# Altium PCB 12V_BuckConverter.PcbDoc
Units mil, origin at the board's own origin, x right, y up, seen from the top; angles counter-clockwise.
Board outline 1935 x 2655 mil, 2 copper layers (Top Layer, Bottom Layer); 26 components, 15 nets, 77 pads, 60 vias.
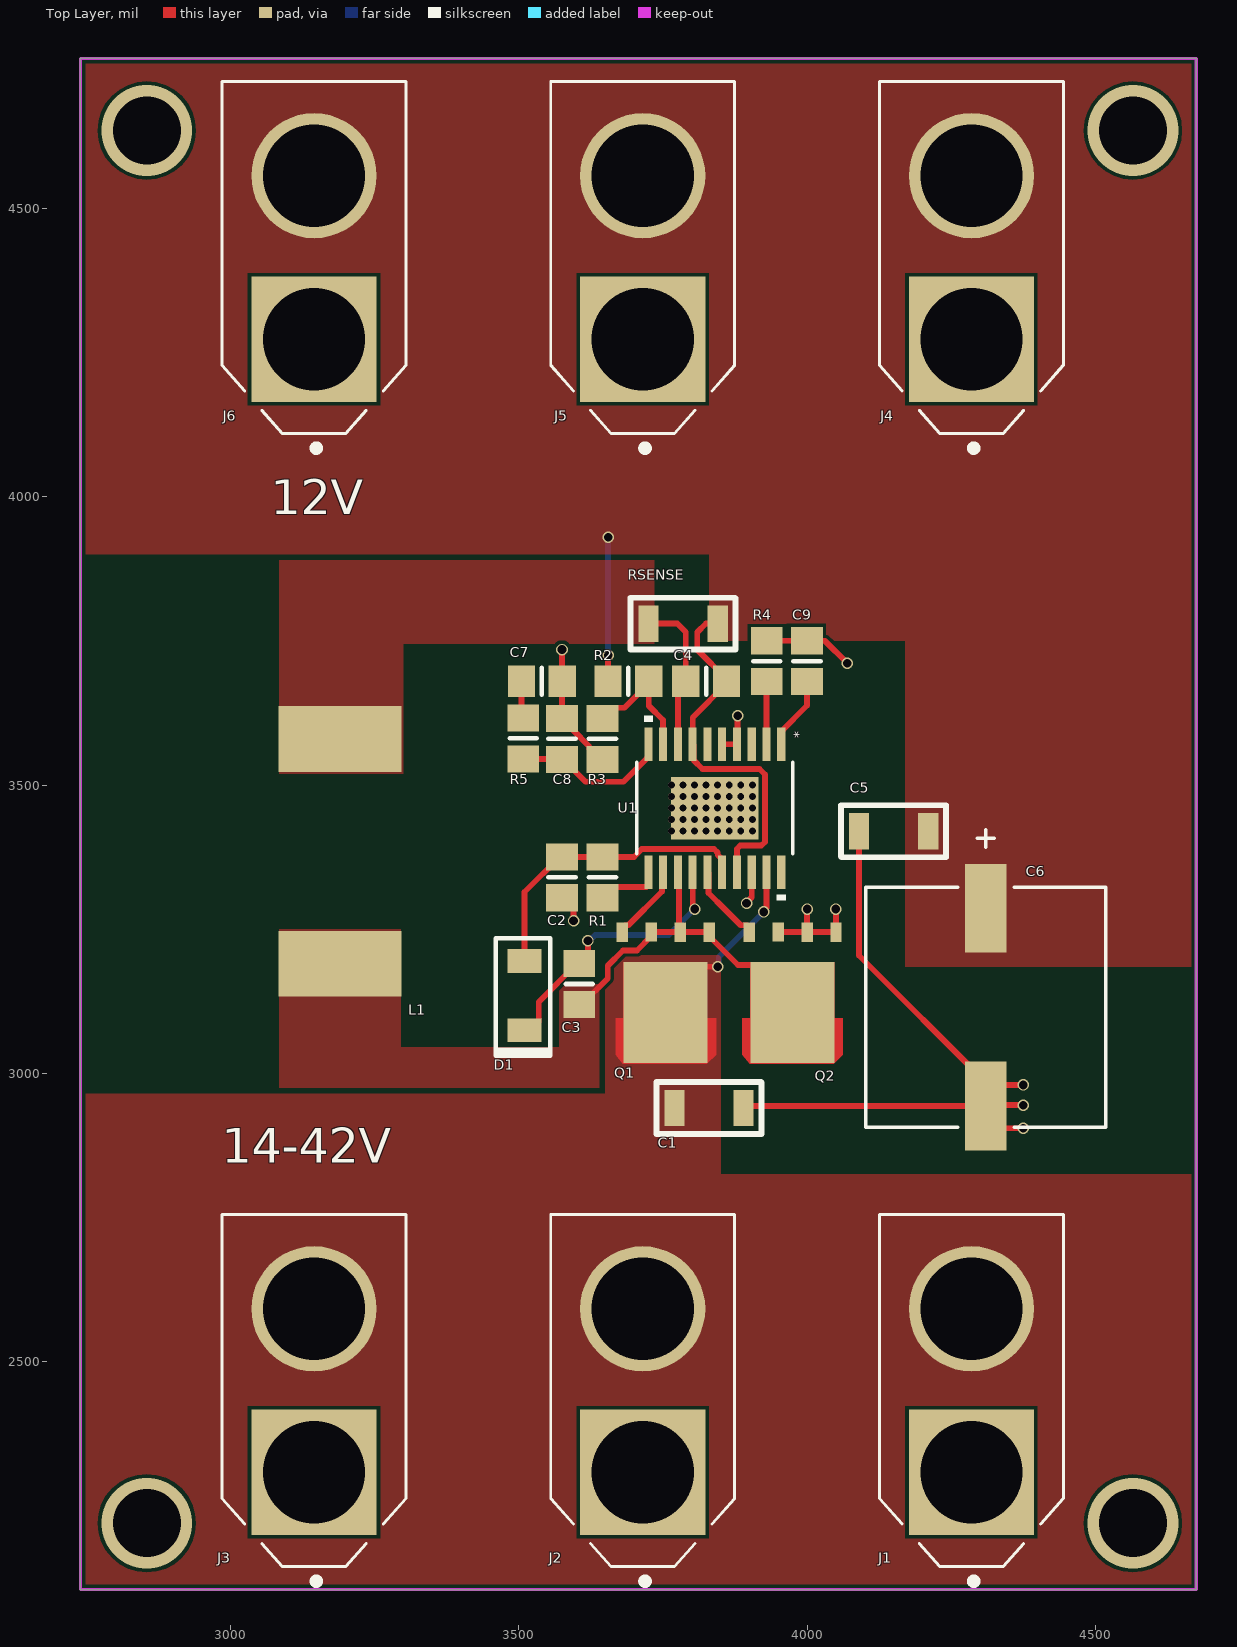
[diagram p0: Top Layer view]
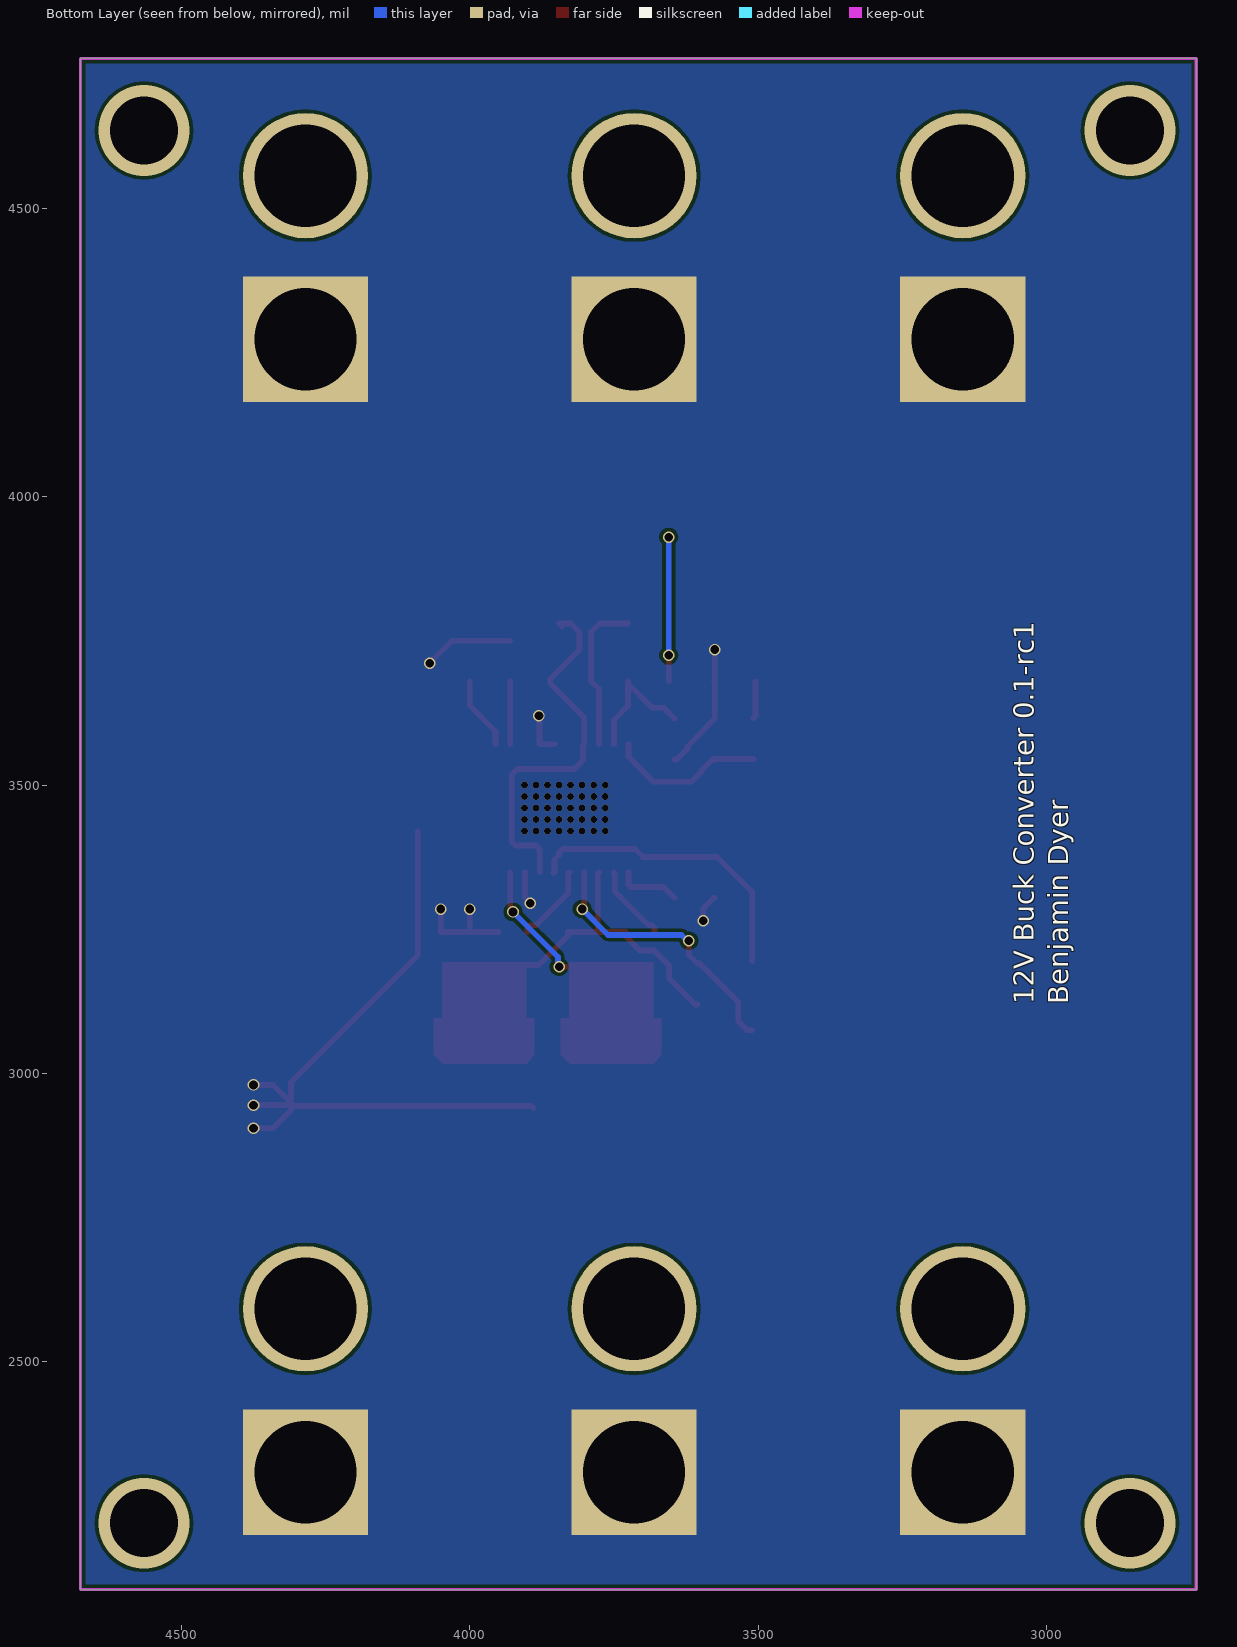
[diagram p1: Bottom Layer view, seen from below]

## Layer stack, top to bottom
Top Solder: solder mask 0.4, Solder Resist, Dk 3.5
Top Layer: signal copper 1.4
Dielectric 1: dielectric 12.6, FR-4, Dk 4.8
Bottom Layer: signal copper 1.4
Bottom Solder: solder mask 0.4, Solder Resist, Dk 3.5

## Board outline
2740,2105 4675,2105 4675,4760 2740,4760

## Design rules (kind name [scope] priority, off if disabled: settings)
Clearance [All] p1: gap=6 ignorepadtopadclearanceinfootprint=FALSE except(0: Arc-Hole Track-Hole SMDPad-Hole THPad-Hole Via-Hole Fill-Hole Poly-Hole Region-Hole Text-Hole)
PolygonConnect [All] p1: connectstyle=Direct reliefconductorwidth=10 reliefentries=4 polygonreliefangle="90 Angle" airgapwidth=10
RoutingVias [All] p1: holewidth=28 width=50 viastyle="Through Hole" minholewidth=12 minwidth=12 maxholewidth=100 maxwidth=500
SolderMaskExpansion [All] p1: expansion=4 istentingtop=FALSE
Width [All] p1: maxlimit=50 minlimit=6 preferedwidth=10
30 further rules are at their usual default settings.

## Classes and differential pairs
component class Connectors: J1 J2 J3 J4 J5 J6
component class 12V_BuckConverter: C1 C2 C3 C4 C5 C6 C7 C8 C9 D1 L1 Q1 Q2 R1 R2 R3 R4 R5 RSENSE U1

## Components (designator, comment, footprint, x,y, rotation, side; value= is the part's Value field where it differs from the comment)
C1 "Cap" 1206 3830,2940 r180 top value=2.2uF
C2 "Cap" 6-0805_N 3575,3340 r90 top value=2.2uF
C3 "Cap" 6-0805_N 3605,3155 r90 top value=0.1uF
C4 "Cap" 6-0805_N 3825,3680 r180 top value=1nF
C5 "Cap" 1206 4150,3420 r0 top value=10uF
C6 "150uF" PCAP_SVP_F8 4310,3115 r270 top value=Value
C7 "Cap" 6-0805_N 3540,3680 r0 top value=4.7nF
C8 "Cap" 6-0805_N 3575,3580 r90 top value=47pF
C9 "Cap" 6-0805_N 4000,3715 r90 top value=0.1uF
D1 "D Schottky" DFLS1100 3510,3135 r270 top
J1 "XT60-M" *AMASS_XT60-M 4285,2450 r90 top
J2 "XT60-M" *AMASS_XT60-M 3715,2450 r90 top
J3 "XT60-M" *AMASS_XT60-M 3145,2450 r90 top
J4 "XT60-M" *AMASS_XT60-M 4285,4415 r90 top
J5 "XT60-M" *AMASS_XT60-M 3715,4415 r90 top
J6 "XT60-M" *AMASS_XT60-M 3145,4415 r90 top
L1 "Inductor" "WURTH 7443320470" 3190,3385 r90 top value=4.7mH
Q1 "MOSFET-N" *SOT-669 3748.89,3113 r180 top
Q2 "MOSFET-N" *SOT-669 3968.89,3113 r180 top
R1 "Res1" 6-0805_N 3645,3340 r90 top value=1K
R2 "Res1" 6-0805_N 3690,3680 r0 top value=1M
R3 "Res1" 6-0805_N 3645,3580 r270 top value=71.5K
R4 "Res1" 6-0805_N 3930,3715 r90 top value=60.4K
R5 "Res1" 6-0805_N 3507.97,3580.81 r90 top value=15.4K
RSENSE "Res1" 1206 3785,3780 r180 top value=5m
U1 "LTC3807HFE#PBF" TSSOP-20_FE/CB 3840,3460 r270 top value=Value

## Footprints (in the part's own frame and the unit in brackets; to place one, negate y for a bottom-side part, rotate by r counter-clockwise, add the part's x,y. Pads: shape width x height; smd on the part's side, far side on the other; paste and mask are expansions set on the pad)
6-0805_N [mm] "Chip Resistor, Body 2.0x1.2mm, IPC Medium Density"
  rect 1.2x1.4 smd: 1(-0.9,0) 2(0.9,0)
  silkscreen extent 0,-0.6 0,0.6, body extent -1.07,-0.7 1.07,0.7, height 0.7
1206 [mil]
  rect 35x63 smd: 1(-60,0) 2(60,0)
  silkscreen extent -91,-45 91,45
*AMASS_XT60-M [mm]
  rect 5.516x5.516 hole 4.5: 1(-3.6,0)
  round 5.516 hole 4.5: 2(3.6,0)
  silkscreen extent -8.55,-4.05 7.75,4.05
*SOT-669 [mm]
  rect 0.5x0.85 smd: 1(-2.064,-3.353) 1(-0.79,-3.353) 1(0.483,-3.354) 2(1.757,-3.354)
  rect 3.7x4.45 smd: 3(-0.145,0.193)
  Top Layer region: -1.74,2.42 -1.99,2.37 -1.99,-2.03 1.71,-2.03 1.71,2.37 1.46,2.42
  Top Layer region: -2.368,0.448 2.057,0.448 2.057,2.043 1.732,2.448 -1.968,2.448 -2.368,2.048
DFLS1100 [mm]
  rect 1.05x1.5 smd: A(-1.525,0) K(1.525,0)
  silkscreen extent -2.53,-1.27 2.66,1.14
PCAP_SVP_F8 [mil]
  rect 154x72 smd paste+0 mask+0: 1(-171.5,0) 2(171.5,0)
  silkscreen extent -308,-208 208,208, body extent 0,0 10,10, height 10
TSSOP-20_FE/CB [mil]
  rect 58x14 smd paste+0 mask+0: 1(-111,115.2) 2(-111,89.6) 3(-111,64) 4(-111,38.4) 5(-111,12.8) 6(-111,-12.8) 7(-111,-38.4) 8(-111,-64) 9(-111,-89.6) 10(-111,-115.2) 11(111,-115.2) 12(111,-89.6) 13(111,-64) 14(111,-38.4) 15(111,-12.8) 16(111,12.8) 17(111,38.4) 18(111,64) 19(111,89.6) 20(111,115.2)
  rect 108x152 smd paste-75.5 mask+0: EPAD(0,0)
  silkscreen extent -160,-135 160,135, body extent 0,0 10,10, height 10
"WURTH 7443320470" [mm]
  rect 2.9x5.4 smd: 1(-4.95,0) 2(4.95,0)
  body extent -6.48,-6.48 6.48,6.48, height 9.5

## Part data
C1 C2 C3 C4 C5 C7 C8 C9: "Capacitor", LatestRevisionDate=17-Jul-2002, LatestRevisionNote="Re-released for DXP Platform.", PackageDescription="Radial Cap, Thru-Hole; 2 Leads; 0.3 in Pin Spacing", PackageReference=RAD-0.3, Published=8-Jun-2000, Publisher="Altium Limited"
C6: library part 16SVP150M, "No Description Available", Built_By=EMA_UL_Team, Copyright="Copyright (C) 2018 Accelerated Designs. All rights reserved", Manufacturer_Part_Number=16SVP150M, RefDes=RefDes, Type=DEV, Vendor=Panasonic
D1: "Schottky Diode", Code_JEDEC=DO-214-AA, LatestRevisionDate=17-Jul-2002, LatestRevisionNote="Re-released for DXP Platform.", PackageDescription="DO-214-AA/SMB; 2 C-Bend Leads; Body 5.3 x 3.6 mm, inc. leads (LxW)", PackageReference=SMB, Published=8-Jun-2000, Publisher="Altium Limited"
J1 J2 J3 J4 J5 J6: "Plug; DC supply; XT60; male; PIN: 2; for cable; soldered; 30A; 500V", Package="Package Analog Devices", Availability=Unavailable, MF=AMASS, MP=XT60-M, Price=None, SnapEDA_Link=https://www.snapeda.com/parts/XT60-M/AMASS/view-part/2883912/?ref=snap
Q1 Q2: "N-Channel MOSFET", LatestRevisionDate=17-Jul-2002, LatestRevisionNote="Re-released for DXP Platform.", PackageDescription="TO, Flat Index; 3 In-Line, Axial Leads; Body Dia. 4.6mm; Lead Dia. 0.5 mm (max)", PackageReference=E3, PackageVersion=1995/1996, Published=8-Jun-2000, Publisher="Altium Limited"
R1 R2 R3 R4 R5 RSENSE: "Resistor", LatestRevisionDate=17-Jul-2002, LatestRevisionNote="Re-released for DXP Platform.", PackageDescription="Axial Device, Thru-Hole; 2 Leads; 0.3 in Pin Spacing", PackageReference=AXIAL-0.3, Published=8-Jun-2000, Publisher="Altium Limited"
U1: "No Description Available", Built_By=EMA_UL_Team, Copyright="Copyright (C) 2018 Accelerated Designs. All rights reserved", Manufacturer_Part_Number=LTC3807HFE#PBF, RefDes=RefDes, Type=DEV, Vendor="Linear Technology"
L1: Code_IEC=1005, Code_JEITA=0402, LatestRevisionDate=29-May-2009, LatestRevisionNote="IPC-7351 Footprint Added.", PackageDescription="Chip Inductor", PackageReference=0402-A, Published=8-Jun-2000, Publisher="Altium Limited"

## Via types
v1: diameter 12, hole 12, Top Layer to Bottom Layer, tented both sides, 40 vias
v2: diameter 20, hole 15, Top Layer to Bottom Layer, tented both sides, 16 vias
v3: diameter 157.48, hole 118.11, Top Layer to Bottom Layer, 4 vias

## Nets (pads, with @x,y where several pads share a name; then routed paths per layer and width w, separated by ;. In a path a pad name is that pad's centre, name@x,y a point inside that pad or via, vN(x,y) a via of type N, cw(c..) or ccw(c..) an arc to the next point about the centre after c; other vN are vias at no path point)
12V: C4.1 C5.2 C6.1 J4.2 J5.2 J6.2 R2.1 RSENSE.1 U1.7 U1.17 | length 911.6
  Top Layer w10: R2.1 3655,3680.43 v2(3655,3725) ; RSENSE.1@3840,3775 RSENSE.1 3824.57,3780 3809.57,3765 3809.57,3734.8 3860.43,3683.94 C4.1 3860.43,3676.06 3801.6,3617.23 U1.7 3803.6,3569 3803.6,3543.04 3818.64,3528 3917.56,3528 3927,3518.56 3927,3401.44 3920.56,3395 3884.26,3395 3878.4,3389.14 U1.17
  Bottom Layer w10: v2(3655,3725) v2(3655,3930)
GND: C1.1 C2.1 C5.1 C6.2 C7.2 C8.2 C9.2 J1.1 J2.1 J3.1 J4.1 J5.1 J6.1 Q2.1 R3.2 R4.2 U1.4 U1.5 U1.18 U1.EPAD | length 1957.6
  Top Layer w10: C2.1 3576.38,3304.57 3595,3285.94 v2(3595,3265) ; v2(3575,3735) 3575,3680.43 C7.2 3575,3679.57 C8.2 3592.45,3597.98 3592.86,3596.71 3622.44,3567.13 3622.44,3563.19 3641.06,3544.57 R3.2 ; U1.5 U1.4 3879.2,3571.8 3879.2,3619.2 v2(3880,3620) ; C1.1 3893.5,2943.5 C6.2 ; v2(3895,3295) 3895,3296.48 3904,3305.48 U1.18 ; R4.2 C9.2 4030.7,3750.43 v2(4069.57,3711.56) ; Q2.1@3949.86,3245.06 3999.94,3245.06 Q2.1@4000,3245 ; v2(4000,3285) Q2.1@4000,3245 ; v2(4050,3285) 4050.08,3284.92 4050.08,3245.11 Q2.1@4050.16,3245.03 ; Q2.1@4050.13,3245 Q2.1@4000,3245 ; C5.1 4090,3204.5 4310,2984.5 C6.2@4310,2949 ; v2(4375,2905) 4341,2905 4310,2936 C6.2 ; v2(4375,2945) 4311.5,2945 C6.2 ; v2(4375,2980) 4341,2980 C6.2@4310,2949 ; C6.2 C6.2@4310,2949
  other v1: 3765,3420 3785,3420 3805,3420 3825,3420 3845,3420 3865,3420 3885,3420 3905,3420 3765,3440 3785,3440 3805,3440 3825,3440 3845,3440 3865,3440 3885,3440 3905,3440 3765,3460 3785,3460 3805,3460 3825,3460 3845,3460 3865,3460 3885,3460 3905,3460 3765,3480 3785,3480 3805,3480 3825,3480 3845,3480 3865,3480 3885,3480 3905,3480 3765,3500 3785,3500 3805,3500 3825,3500 3845,3500 3865,3500 3885,3500 3905,3500
INTVCC: C2.2 D1.A R1.2 U1.16 | length 527.6
  Top Layer w10: D1.A 3510,3314.37 3571.06,3375.43 C2.2 R1.2 3699.68,3375.43 3713.24,3389 3838.76,3389 3845.2,3382.56 3845.2,3378.6 3852.8,3371 U1.16 U1.16@3854.8,3347
NetC3_1: C3.1 L1.1 Q1.1 Q2.3 U1.13 | length 614.5
  Top Layer w10: C3.1 3608.94,3119.57 3654.15,3164.78 3654.15,3186.72 3680.73,3213.3 3704.99,3213.3 3729.86,3238.17 3729.86,3245.06 Q1.1@3779.94,3245.06 ; U1.13 3778,3347 3778,3247 Q1.1@3779.94,3245.06 ; Q2.3 3974.59,3120.16 3906.76,3188 3880.3,3188 3830.13,3238.17 3830.13,3245 3780,3245 Q1.1@3779.94,3245.06
NetC3_2: C3.2 D1.K U1.14 | length 481.3
  Top Layer w10: D1.K 3518.86,3074.96 3534.53,3090.63 3534.53,3123.9 3601.06,3190.43 C3.2 3620,3205.43 v2(3620,3230) ; U1.14 3801.6,3291.11 3805,3287.71 v2(3805,3285)
  Bottom Layer w10: v2(3620,3230) 3622.71,3230 3632.71,3240 3760,3240 v2(3805,3285)
NetC4_2: C4.2 L1.2 RSENSE.2 U1.8 | length 270.7
  Top Layer w10: RSENSE.2 3775,3780 3789.57,3765.43 C4.2 3776,3666.43 U1.8
NetC7_1: C7.1 R5.2 | length 65.2
  Top Layer w10: C7.1 3504.57,3619.65 R5.2
NetC8_1: C8.1 R5.1 U1.10 | length 274.2
  Top Layer w10: R5.1 3574.19,3545.38 C8.1 3578.94,3544.57 3597.56,3525.94 3597.56,3523.98 3615.59,3505.94 3681.74,3505.94 3724.8,3549 U1.10
NetC9_1: C9.1 U1.1 | length 127.1
  Top Layer w10: U1.1 3955.2,3593 4000,3637.8 C9.1
NetQ1_2: Q1.2 U1.12 | length 136.3
  Top Layer w10: Q1.2 3679.7,3251.93 3684.54,3256.77 3689.78,3256.77 3748.4,3315.39 3748.4,3347 U1.12
NetQ2_2: Q2.2 U1.15 | length 139.7
  Top Layer w10: U1.15 3829.2,3347 3829.2,3312.7 3857.17,3284.74 3885.14,3256.77 3894.86,3256.77 3899.7,3251.93 Q2.2
NetR1_1: R1.1 U1.11 | length 111.1
  Top Layer w10: R1.1 3663.62,3323.19 3720.99,3323.19 3724.8,3327 U1.11
NetR2_2: R2.2 R3.1 U1.9 | length 224.9
  Top Layer w10: R3.1 3663.62,3634.06 3683.43,3634.06 R2.2@3725.43,3676.06 ; R2.2 R2.2@3725.43,3676.06 ; U1.9 3750,3571.4 3750,3612.87 3725.43,3637.44 R2.2@3725.43,3676.06
NetR4_1: R4.1 U1.2 | length 108.7
  Top Layer w10: U1.2 3929.6,3679.17 R4.1
Vbatt: C1.2 J1.2 J2.2 J3.2 Q1.3 U1.19 | length 329.3
  Top Layer w10: Q1.3 3754.59,3117.17 3822.43,3185 v2(3845,3185) ; v2(3925,3280) 3925,3282.71 3929.6,3287.31 U1.19
  Bottom Layer w10: v2(3845,3185) 3846.91,3186.91 3846.91,3201.91 v2(3925,3280)
pads on no net: U1.3 U1.6 U1.20
copper on no net:
  other v3: 2855,2220 4565,2220 2855,4635 4565,4635

## Polygon pours and split planes (outlines as drawn)
12V on Top Layer "12V_L01_P003" (solid, pour order 3): 2740,3900 2740,4760 4675,4760 4675,3185 4170,3185 4170,3750 3830,3750 3830,3900
Vbatt on Top Layer "VBATT_L01_P000" (solid, pour order 0): 2740,2105 2740,2965 3650,2965 3650,3205 3850,3205 3850,2825 4675,2825 4675,2105
NetC4_2 on Top Layer "NETC4_2_L01_P002" (solid, pour order 2): 3085,3520 3085,3890 3735,3890 3735,3745 3300,3745 3300,3520
NetC3_1 on Top Layer "NETC3_1_L01_P001" (solid, pour order 1): 3085,2975 3085,3250 3295,3250 3295,3045 3570,3045 3570,3155 3640,3155 3640,2975
GND on Bottom Layer "GND_L02_P004" (solid, pour order 4): 2740,2105 4675,2105 4675,4760 2740,4760

## Keep-outs
Keep-Out Layer:
  lines w6: 2740,2105 2845,2105 4675,2105 4675,4760 2740,4760 2740,2105

## Silkscreen, mask and mechanical layers (free items; w line width, h text height)
Top Overlay:
  text "12V" at 3070,3970 h60
  text "14-42V" at 2985,2845 h60
Bottom Overlay:
  text "12V Buck Converter 0.1-rc1 / Benjamin Dyer" at 2950,3120 h60 r270
PolyDraw:
  lines w6: 2740,2105 2740,2965 3650,2965 3650,3205 3850,3205 3850,2825 4675,2825 4675,2105 2740,2105 ; 2740,3900 3830,3900 3830,3750 4170,3750 4170,3185 4675,3185 4675,4760 2740,4760 2740,3900 ; 3085,2975 3085,3250 3295,3250 3295,3045 3570,3045 3570,3155 3580,3155 3640,3155 3640,2975 3085,2975 ; 3085,3520 3085,3890 3735,3890 3735,3745 3300,3745 3300,3520 3085,3520

## Text inside footprints (layer, text, board x,y; h text height)
C6: Mechanical 7 "Default Padstyle: RX154Y72D0T" at 3871,3477.5 h30 r270; Mechanical 7 "Alternate 1 Padstyle: OX60Y90D30P" at 3771,3527.5 h30 r270; Mechanical 7 "Alternate 2 Padstyle: OX90Y60D30P" at 3671,3527.5 h30 r270; Mechanical 7 "0.032in/0.813mm" at 4297.5,2746.5 h30 r270; Mechanical 7 "0.441in/11.201mm" at 4633,3215 h30 r270; Mechanical 7 "0.406in/10.312mm" at 4297.5,3638 h30 r270; Mechanical 7 "0.126in/3.2mm" at 3962,3353.75 h30 r270; Mechanical 7 "0.406in/10.312mm" at 3862,3215 h30 r270
U1: Top Overlay "*" at 3964.2,3593.5 h30 r270; Mechanical 7 "0.03in/0.762mm" at 3590,3658.5 h30 r270; Mechanical 7 "0.026in/0.65mm" at 3929.9,3866 h30 r270; Mechanical 7 "0.26in/6.604mm" at 3827.5,3251.5 h30 r270; Mechanical 7 "0.252in/6.401mm" at 4140,3553.75 h30 r270; Mechanical 7 "0.177in/4.496mm" at 4065,3553.75 h30 r270; Mechanical 7 "Alt 2 Padstyle: OX90Y60D30P" at 3210,3797.5 h30 r270; Mechanical 7 "Alt 1 Padstyle: OX60Y90D30P" at 3270,3797.5 h30 r270; Mechanical 7 "Heat Tab Padstyle: RX108Y152D0T" at 3390,3847.5 h30 r270; Mechanical 7 "Pin One Padstyle: RX58Y14D0T" at 3450,3810 h30 r270; Mechanical 7 "Default Padstyle: RX58Y14D0T" at 3510,3810 h30 r270; Mechanical 13 "*" at 3917,3546 h30 r270